# EAGLE board small_layout_untitled (EAGLE 9.6.2)

Size 125 x 110 mm. Coordinates in mm from the lower left corner, seen from the top.
Outline: 0,0 125,0 125,110 0,110 0,0
Copper layers (1+2*15+16): Top 0.035mm / dielectric 1.5mm / Route2 0.035mm / dielectric 0.15mm / Route15 0.035mm / dielectric 0.2mm / Bottom 0.035mm
Design rules "default *": minimum track width 6mil, minimum drill 0.35mm, track to track 6mil, track to pad 6mil, pad to pad 6mil, via to via 6mil, smd to smd 6mil, copper to edge 40mil, drill to drill 6mil, minimum pad ring 10mil, minimum via ring 8mil, stop-mask expansion 4mil, vias tented up to drill 0mil, thermal gap 10mil

## Footprints (pad centres in the part's own frame; a part is rotated, then mirrored left to right if it is on the bottom)
M0805 = smd 1.3 x 1.6: 1 -0.95,0; 2 0.95,0
1X10 = drill 1.016 long: 1 -11.43,0; 2 -8.89,0; 3 -6.35,0; 4 -3.81,0; 5 -1.27,0; 6 1.27,0; 7 3.81,0; 8 6.35,0; 9 8.89,0; 10 11.43,0
1X02 = drill 1.016 long: 1 -1.27,0; 2 1.27,0
1X04 = drill 1.016 long: 1 -3.81,0; 2 -1.27,0; 3 1.27,0; 4 3.81,0
SO16 = smd 0.6 x 1.2: 1 -4.445,-2.8; 2 -3.175,-2.8; 3 -1.905,-2.8; 4 -0.635,-2.8; 5 0.635,-2.8; 6 1.905,-2.8; 7 3.175,-2.8; 8 4.445,-2.8; 9 4.445,2.8; 10 3.175,2.8; 11 1.905,2.8; 12 0.635,2.8; 13 -0.635,2.8; 14 -1.905,2.8; 15 -3.175,2.8; 16 -4.445,2.8
TEXAS_INSTRUMENTS_SN74LVC16373A_2 = smd 1.6 x 0.3: 1 -3.9,5.75; 2 -3.9,5.25; 3 -3.9,4.75; 4 -3.9,4.25; 5 -3.9,3.75; 6 -3.9,3.25; 7 -3.9,2.75; 8 -3.9,2.25; 9 -3.9,1.75; 10 -3.9,1.25; 11 -3.9,0.75; 12 -3.9,0.25; 13 -3.9,-0.25; 14 -3.9,-0.75; 15 -3.9,-1.25; 16 -3.9,-1.75; 17 -3.9,-2.25; 18 -3.9,-2.75; 19 -3.9,-3.25; 20 -3.9,-3.75; 21 -3.9,-4.25; 22 -3.9,-4.75; 23 -3.9,-5.25; 24 -3.9,-5.75; 25 3.9,-5.75; 26 3.9,-5.25; 27 3.9,-4.75; 28 3.9,-4.25; 29 3.9,-3.75; 30 3.9,-3.25; 31 3.9,-2.75; 32 3.9,-2.25; 33 3.9,-1.75; 34 3.9,-1.25; 35 3.9,-0.75; 36 3.9,-0.25; 37 3.9,0.25; 38 3.9,0.75; 39 3.9,1.25; 40 3.9,1.75; 41 3.9,2.25; 42 3.9,2.75; 43 3.9,3.25; 44 3.9,3.75; 45 3.9,4.25; 46 3.9,4.75; 47 3.9,5.25; 48 3.9,5.75
FH12-20S-0.5SH = smd 0.3 x 1.3: 1 -4.75,3.25; 2 -4.25,3.25; 3 -3.75,3.25; 4 -3.25,3.25; 5 -2.75,3.25; 6 -2.25,3.25; 7 -1.75,3.25; 8 -1.25,3.25; 9 -0.75,3.25; 10 -0.25,3.25; 11 0.25,3.25; 12 0.75,3.25; 13 1.25,3.25; 14 1.75,3.25; 15 2.25,3.25; 16 2.75,3.25; 17 3.25,3.25; 18 3.75,3.25; 19 4.25,3.25; 20 4.75,3.25

## Placement (x,y rotation side)
CONNECTION_BETWEEN_SR5-6  [M0805]  15,30 270 top
CONNECTION_BETWEEN_SR10-11  [M0805]  15,50 270 top
CONNECTION_BETWEEN_SR15-16  [M0805]  15,70 270 top
CONNECTION_BETWEEN_SR20-21  [M0805]  15,90 270 top
EN_JP1  [1X10]  8,55 90 top
EN_JP2  [1X10]  119,55 90 top
IN_JP1  [1X02]  13.5,20 90 top
IN_JP2  [1X02]  13.5,40 90 top
IN_JP3  [1X02]  13.5,60 90 top
IN_JP4  [1X02]  13.5,80 90 top
IN_JP5  [1X02]  13.5,100 90 top
LATCH1-2  [M0805]  12,30 270 top
LATCH2-3  [M0805]  12,50 270 top
LATCH3-4  [M0805]  12,70 270 top
LATCH4-5  [M0805]  12,90 270 top
OUT_JP1  [1X02]  115,20 90 top
OUT_JP2  [1X02]  115,40 90 top
OUT_JP3  [1X02]  115,60 90 top
OUT_JP4  [1X02]  115,80 90 top
OUT_JP5  [1X02]  115,100 90 top
POWER_JP1  [1X04]  8,15 90 top
POWER_JP2  [1X04]  8,95 90 top
POWER_JP3  [1X04]  119,15 90 top
POWER_JP4  [1X04]  119,95 90 top
SR1  74HC595  [SO16]  25,20 0 top
SR2  74HC595  [SO16]  45,20 0 top
SR3  74HC595  [SO16]  65,20 0 top
SR4  74HC595  [SO16]  85,20 0 top
SR5  74HC595  [SO16]  105,20 0 top
SR6  74HC595  [SO16]  25,40 0 top
SR7  74HC595  [SO16]  45,40 0 top
SR8  74HC595  [SO16]  65,40 0 top
SR9  74HC595  [SO16]  85,40 0 top
SR10  74HC595  [SO16]  105,40 0 top
SR11  74HC595  [SO16]  25,60 0 top
SR12  74HC595  [SO16]  45,60 0 top
SR13  74HC595  [SO16]  65,60 0 top
SR14  74HC595  [SO16]  85,60 0 top
SR15  74HC595  [SO16]  105,60 0 top
SR16  74HC595  [SO16]  25,80 0 top
SR17  74HC595  [SO16]  45,80 0 top
SR18  74HC595  [SO16]  65,80 0 top
SR19  74HC595  [SO16]  85,80 0 top
SR20  74HC595  [SO16]  105,80 0 top
SR21  74HC595  [SO16]  25,100 0 top
SR22  74HC595  [SO16]  45,100 0 top
SR23  74HC595  [SO16]  65,100 0 top
SR24  74HC595  [SO16]  85,100 0 top
SR25  74HC595  [SO16]  105,100 0 top
U1  TEXAS_INSTRUMENTS_SN74LVC16373ATEXAS_INSTRUMENTS_SN74LVC16373A_0_2  [TEXAS_INSTRUMENTS_SN74LVC16373A_2]  25,10 90 top
U2  TEXAS_INSTRUMENTS_SN74LVC16373ATEXAS_INSTRUMENTS_SN74LVC16373A_0_2  [TEXAS_INSTRUMENTS_SN74LVC16373A_2]  45,10 90 top
U3  TEXAS_INSTRUMENTS_SN74LVC16373ATEXAS_INSTRUMENTS_SN74LVC16373A_0_2  [TEXAS_INSTRUMENTS_SN74LVC16373A_2]  65,10 90 top
U4  TEXAS_INSTRUMENTS_SN74LVC16373ATEXAS_INSTRUMENTS_SN74LVC16373A_0_2  [TEXAS_INSTRUMENTS_SN74LVC16373A_2]  85,10 90 top
U5  TEXAS_INSTRUMENTS_SN74LVC16373ATEXAS_INSTRUMENTS_SN74LVC16373A_0_2  [TEXAS_INSTRUMENTS_SN74LVC16373A_2]  105,10 90 top
U6  TEXAS_INSTRUMENTS_SN74LVC16373ATEXAS_INSTRUMENTS_SN74LVC16373A_0_2  [TEXAS_INSTRUMENTS_SN74LVC16373A_2]  25,30 90 top
U7  TEXAS_INSTRUMENTS_SN74LVC16373ATEXAS_INSTRUMENTS_SN74LVC16373A_0_2  [TEXAS_INSTRUMENTS_SN74LVC16373A_2]  45,30 90 top
U8  TEXAS_INSTRUMENTS_SN74LVC16373ATEXAS_INSTRUMENTS_SN74LVC16373A_0_2  [TEXAS_INSTRUMENTS_SN74LVC16373A_2]  65,30 90 top
U9  TEXAS_INSTRUMENTS_SN74LVC16373ATEXAS_INSTRUMENTS_SN74LVC16373A_0_2  [TEXAS_INSTRUMENTS_SN74LVC16373A_2]  85,30 90 top
U10  TEXAS_INSTRUMENTS_SN74LVC16373ATEXAS_INSTRUMENTS_SN74LVC16373A_0_2  [TEXAS_INSTRUMENTS_SN74LVC16373A_2]  105,30 90 top
U11  TEXAS_INSTRUMENTS_SN74LVC16373ATEXAS_INSTRUMENTS_SN74LVC16373A_0_2  [TEXAS_INSTRUMENTS_SN74LVC16373A_2]  25,50 90 top
U12  TEXAS_INSTRUMENTS_SN74LVC16373ATEXAS_INSTRUMENTS_SN74LVC16373A_0_2  [TEXAS_INSTRUMENTS_SN74LVC16373A_2]  45,50 90 top
U13  TEXAS_INSTRUMENTS_SN74LVC16373ATEXAS_INSTRUMENTS_SN74LVC16373A_0_2  [TEXAS_INSTRUMENTS_SN74LVC16373A_2]  65,50 90 top
U14  TEXAS_INSTRUMENTS_SN74LVC16373ATEXAS_INSTRUMENTS_SN74LVC16373A_0_2  [TEXAS_INSTRUMENTS_SN74LVC16373A_2]  85,50 90 top
U15  TEXAS_INSTRUMENTS_SN74LVC16373ATEXAS_INSTRUMENTS_SN74LVC16373A_0_2  [TEXAS_INSTRUMENTS_SN74LVC16373A_2]  105,50 90 top
U16  TEXAS_INSTRUMENTS_SN74LVC16373ATEXAS_INSTRUMENTS_SN74LVC16373A_0_2  [TEXAS_INSTRUMENTS_SN74LVC16373A_2]  25,70 90 top
U17  TEXAS_INSTRUMENTS_SN74LVC16373ATEXAS_INSTRUMENTS_SN74LVC16373A_0_2  [TEXAS_INSTRUMENTS_SN74LVC16373A_2]  45,70 90 top
U18  TEXAS_INSTRUMENTS_SN74LVC16373ATEXAS_INSTRUMENTS_SN74LVC16373A_0_2  [TEXAS_INSTRUMENTS_SN74LVC16373A_2]  65,70 90 top
U19  TEXAS_INSTRUMENTS_SN74LVC16373ATEXAS_INSTRUMENTS_SN74LVC16373A_0_2  [TEXAS_INSTRUMENTS_SN74LVC16373A_2]  85,70 90 top
U20  TEXAS_INSTRUMENTS_SN74LVC16373ATEXAS_INSTRUMENTS_SN74LVC16373A_0_2  [TEXAS_INSTRUMENTS_SN74LVC16373A_2]  105,70 90 top
U21  TEXAS_INSTRUMENTS_SN74LVC16373ATEXAS_INSTRUMENTS_SN74LVC16373A_0_2  [TEXAS_INSTRUMENTS_SN74LVC16373A_2]  25,90 90 top
U22  TEXAS_INSTRUMENTS_SN74LVC16373ATEXAS_INSTRUMENTS_SN74LVC16373A_0_2  [TEXAS_INSTRUMENTS_SN74LVC16373A_2]  45,90 90 top
U23  TEXAS_INSTRUMENTS_SN74LVC16373ATEXAS_INSTRUMENTS_SN74LVC16373A_0_2  [TEXAS_INSTRUMENTS_SN74LVC16373A_2]  65,90 90 top
U24  TEXAS_INSTRUMENTS_SN74LVC16373ATEXAS_INSTRUMENTS_SN74LVC16373A_0_2  [TEXAS_INSTRUMENTS_SN74LVC16373A_2]  85,90 90 top
U25  TEXAS_INSTRUMENTS_SN74LVC16373ATEXAS_INSTRUMENTS_SN74LVC16373A_0_2  [TEXAS_INSTRUMENTS_SN74LVC16373A_2]  105,90 90 top
X1  FH12-20S-0.5SH  [FH12-20S-0.5SH]  25,10 180 bottom
X2  FH12-20S-0.5SH  [FH12-20S-0.5SH]  50,10 180 bottom
X3  FH12-20S-0.5SH  [FH12-20S-0.5SH]  80,10 180 bottom
X4  FH12-20S-0.5SH  [FH12-20S-0.5SH]  105,10 180 bottom
X5  FH12-20S-0.5SH  [FH12-20S-0.5SH]  25,30 180 bottom
X6  FH12-20S-0.5SH  [FH12-20S-0.5SH]  50,30 180 bottom
X7  FH12-20S-0.5SH  [FH12-20S-0.5SH]  80,30 180 bottom
X8  FH12-20S-0.5SH  [FH12-20S-0.5SH]  105,30 180 bottom
X9  FH12-20S-0.5SH  [FH12-20S-0.5SH]  25,50 180 bottom
X10  FH12-20S-0.5SH  [FH12-20S-0.5SH]  50,50 180 bottom
X11  FH12-20S-0.5SH  [FH12-20S-0.5SH]  80,50 180 bottom
X12  FH12-20S-0.5SH  [FH12-20S-0.5SH]  105,50 180 bottom
X13  FH12-20S-0.5SH  [FH12-20S-0.5SH]  25,70 180 bottom
X14  FH12-20S-0.5SH  [FH12-20S-0.5SH]  50,70 180 bottom
X15  FH12-20S-0.5SH  [FH12-20S-0.5SH]  80,70 180 bottom
X16  FH12-20S-0.5SH  [FH12-20S-0.5SH]  105,70 180 bottom
X17  FH12-20S-0.5SH  [FH12-20S-0.5SH]  25,90 180 bottom
X18  FH12-20S-0.5SH  [FH12-20S-0.5SH]  50,90 180 bottom
X19  FH12-20S-0.5SH  [FH12-20S-0.5SH]  80,90 180 bottom
X20  FH12-20S-0.5SH  [FH12-20S-0.5SH]  105,90 180 bottom

## Library data of the parts
CONNECTION_BETWEEN_SR5-6 CONNECTION_BETWEEN_SR10-11 CONNECTION_BETWEEN_SR15-16 CONNECTION_BETWEEN_SR20-21 LATCH1-2 LATCH2-3 LATCH3-4 LATCH4-5 = rcl; SPICEPREFIX: R
EN_JP1 EN_JP2 IN_JP1-IN_JP5 OUT_JP1-OUT_JP5 POWER_JP1-POWER_JP4 = pinhead
SR1-SR25 = 74HC595; AVAILABILITY: In Stock; DESCRIPTION: Shift Register Single 8-Bit Serial to Serial/Parallel 16-Pin SSOP T/R; MF: Nexperia; MP: 74HC595; PACKAGE: None; PRICE: None
U1-U25 = SN74LVC16373A(NEW_16BIT_LATCH); 3_STATE_OUTPUT: Yes; BITS: 16; CIIVA_IDS: 19307467; CODE__JEDEC: MO-153; DATASHEET_VERSION: SCAS755B; FOOTPRINT_VARIANT_NAME_0: Level C; FOOTPRINT_VARIANT_NAME_1: Level B; FOOTPRINT_VARIANT_NAME_2: Level A; F__NOM_VOLTAGEMAXMHZ: 100; ICC__NOM_VOLTAGEMAXMA: 0.02; IMPORTED: yes; IMPORTED_FROM: vault; IMPORT_TS: 1521844253; INPUT_TYPE: CMOS,TTL; LOGIC: true; MF: Texas Instruments; MPN: SN74LVC16373A; OPERATING_TEMPERATURE_RANGEC: -40 to 125,-40 to 85; OUTPUT_DRIVE_IOLIOHMAXMA: 24/-24; OUTPUT_LOGIC: Non-inverted; OUTPUT_TYPE: CMOS; PACKAGE: DGG0048A; PREFIX: U; RATING: Catalog; RELEASE_DATE: 1459328133; SCHMITT_TRIGGER: No; STATIC_CURRENT: 0.02; TECHNOLOGY_FAMILY: LVC; TPD__NOM_VOLTAGEMAXNS: 6.4,4.2,4.9; VAULT_GUID: 00FB3570-8383-4C82-A038-A58A20934C8C; VAULT_REVISION: B0EE8CD6-9ACA-4FFF-ACFC-C0240CF4C59E; VCC_MAX_V: 3.6; VCC_MIN_V: 1.65; VOLTAGE_NOM_V: 1.8,2.5,2.7,3.3
X1-X20 = con-hirose; MPN: FH12-20S-0.5SH(55); OC_FARNELL: 1324549; OC_NEWARK: 34M6166

## Nets
CLK: POWER_JP1.4 POWER_JP2.4 POWER_JP3.4 POWER_JP4.4 SR1.11 SR2.11 SR3.11 SR4.11 SR5.11 SR6.11 SR7.11 SR8.11 SR9.11 SR10.11 SR11.11 SR12.11 SR13.11 SR14.11 SR15.11 SR16.11 SR17.11 SR18.11 SR19.11 SR20.11 SR21.11 SR22.11 SR23.11 SR24.11 SR25.11
DATA_IN1: IN_JP1.2 SR1.14
DATA_IN2: CONNECTION_BETWEEN_SR5-6.1 IN_JP2.2 SR6.14
DATA_IN3: CONNECTION_BETWEEN_SR10-11.1 IN_JP3.2 SR11.14
DATA_IN4: CONNECTION_BETWEEN_SR15-16.1 IN_JP4.2 SR16.14
DATA_IN5: CONNECTION_BETWEEN_SR20-21.1 IN_JP5.2 SR21.14
DATA_OUT1: CONNECTION_BETWEEN_SR5-6.2 OUT_JP1.2 SR5.9
DATA_OUT2: CONNECTION_BETWEEN_SR10-11.2 OUT_JP2.2 SR10.9
DATA_OUT3: CONNECTION_BETWEEN_SR15-16.2 OUT_JP3.2 SR15.9
DATA_OUT4: CONNECTION_BETWEEN_SR20-21.2 OUT_JP4.2 SR20.9
DATA_OUT5: OUT_JP5.2 SR25.9
EN1: EN_JP1.1 EN_JP2.1 U1.48 U2.48 U3.48 U4.48 U5.48
EN2: EN_JP1.2 EN_JP2.2 U1.25 U2.25 U3.25 U4.25 U5.25
EN3: EN_JP1.3 EN_JP2.3 U6.48 U7.48 U8.48 U9.48 U10.48
EN4: EN_JP1.4 EN_JP2.4 U6.25 U7.25 U8.25 U9.25 U10.25
EN5: EN_JP1.5 EN_JP2.5 U11.48 U12.48 U13.48 U14.48 U15.48
EN6: EN_JP1.6 EN_JP2.6 U11.25 U12.25 U13.25 U14.25 U15.25
EN7: EN_JP1.7 EN_JP2.7 U16.48 U17.48 U18.48 U19.48 U20.48
EN8: EN_JP1.8 EN_JP2.8 U16.25 U17.25 U18.25 U19.25 U20.25
EN9: EN_JP1.9 EN_JP2.9 U21.48 U22.48 U23.48 U24.48 U25.48
EN10: EN_JP1.10 EN_JP2.10 U21.25 U22.25 U23.25 U24.25 U25.25
FPC1_1: U1.2 X1.1
FPC1_2: U1.3 X1.2
FPC1_3: U1.5 X1.3
FPC1_4: U1.6 X1.4
FPC1_5: U1.8 X1.5
FPC1_6: U1.9 X1.6
FPC1_7: U1.11 X1.7
FPC1_8: U1.12 X1.8
FPC1_9: U1.13 X1.9
FPC1_10: U1.14 X1.10
FPC1_11: U1.16 X1.11
FPC1_12: U1.17 X1.12
FPC1_13: U1.19 X1.13
FPC1_14: U1.20 X1.14
FPC1_15: U1.22 X1.15
FPC1_16: U1.23 X1.16
FPC1_17: U2.2 X1.17
FPC1_18: U2.3 X1.18
FPC1_19: U2.5 X1.19
FPC1_20: U2.6 X1.20
FPC2_1: U2.8 X2.1
FPC2_2: U2.9 X2.2
FPC2_3: U2.11 X2.3
FPC2_4: U2.12 X2.4
FPC2_5: U2.13 X2.5
FPC2_6: U2.14 X2.6
FPC2_7: U2.16 X2.7
FPC2_8: U2.17 X2.8
FPC2_9: U2.19 X2.9
FPC2_10: U2.20 X2.10
FPC2_11: U2.22 X2.11
FPC2_12: U2.23 X2.12
FPC2_13: U3.2 X2.13
FPC2_14: U3.3 X2.14
FPC2_15: U3.5 X2.15
FPC2_16: U3.6 X2.16
FPC2_17: U3.8 X2.17
FPC2_18: U3.9 X2.18
FPC2_19: U3.11 X2.19
FPC2_20: U3.12 X2.20
FPC3_1: U3.13 X3.1
FPC3_2: U3.14 X3.2
FPC3_3: U3.16 X3.3
FPC3_4: U3.17 X3.4
FPC3_5: U3.19 X3.5
FPC3_6: U3.20 X3.6
FPC3_7: U3.22 X3.7
FPC3_8: U3.23 X3.8
FPC3_9: U4.2 X3.9
FPC3_10: U4.3 X3.10
FPC3_11: U4.5 X3.11
FPC3_12: U4.6 X3.12
FPC3_13: U4.8 X3.13
FPC3_14: U4.9 X3.14
FPC3_15: U4.11 X3.15
FPC3_16: U4.12 X3.16
FPC3_17: U4.13 X3.17
FPC3_18: U4.14 X3.18
FPC3_19: U4.16 X3.19
FPC3_20: U4.17 X3.20
FPC4_1: U4.19 X4.1
FPC4_2: U4.20 X4.2
FPC4_3: U4.22 X4.3
FPC4_4: U4.23 X4.4
FPC4_5: U5.2 X4.5
FPC4_6: U5.3 X4.6
FPC4_7: U5.5 X4.7
FPC4_8: U5.6 X4.8
FPC4_9: U5.8 X4.9
FPC4_10: U5.9 X4.10
FPC4_11: U5.11 X4.11
FPC4_12: U5.12 X4.12
FPC4_13: U5.13 X4.13
FPC4_14: U5.14 X4.14
FPC4_15: U5.16 X4.15
FPC4_16: U5.17 X4.16
FPC4_17: U5.19 X4.17
FPC4_18: U5.20 X4.18
FPC4_19: U5.22 X4.19
FPC4_20: U5.23 X4.20
FPC5_1: U6.2 X5.1
FPC5_2: U6.3 X5.2
FPC5_3: U6.5 X5.3
FPC5_4: U6.6 X5.4
FPC5_5: U6.8 X5.5
FPC5_6: U6.9 X5.6
FPC5_7: U6.11 X5.7
FPC5_8: U6.12 X5.8
FPC5_9: U6.13 X5.9
FPC5_10: U6.14 X5.10
FPC5_11: U6.16 X5.11
FPC5_12: U6.17 X5.12
FPC5_13: U6.19 X5.13
FPC5_14: U6.20 X5.14
FPC5_15: U6.22 X5.15
FPC5_16: U6.23 X5.16
FPC5_17: U7.2 X5.17
FPC5_18: U7.3 X5.18
FPC5_19: U7.5 X5.19
FPC5_20: U7.6 X5.20
FPC6_1: U7.8 X6.1
FPC6_2: U7.9 X6.2
FPC6_3: U7.11 X6.3
FPC6_4: U7.12 X6.4
FPC6_5: U7.13 X6.5
FPC6_6: U7.14 X6.6
FPC6_7: U7.16 X6.7
FPC6_8: U7.17 X6.8
FPC6_9: U7.19 X6.9
FPC6_10: U7.20 X6.10
FPC6_11: U7.22 X6.11
FPC6_12: U7.23 X6.12
FPC6_13: U8.2 X6.13
FPC6_14: U8.3 X6.14
FPC6_15: U8.5 X6.15
FPC6_16: U8.6 X6.16
FPC6_17: U8.8 X6.17
FPC6_18: U8.9 X6.18
FPC6_19: U8.11 X6.19
FPC6_20: U8.12 X6.20
FPC7_1: U8.13 X7.1
FPC7_2: U8.14 X7.2
FPC7_3: U8.16 X7.3
FPC7_4: U8.17 X7.4
FPC7_5: U8.19 X7.5
FPC7_6: U8.20 X7.6
FPC7_7: U8.22 X7.7
FPC7_8: U8.23 X7.8
FPC7_9: U9.2 X7.9
FPC7_10: U9.3 X7.10
FPC7_11: U9.5 X7.11
FPC7_12: U9.6 X7.12
FPC7_13: U9.8 X7.13
FPC7_14: U9.9 X7.14
FPC7_15: U9.11 X7.15
FPC7_16: U9.12 X7.16
FPC7_17: U9.13 X7.17
FPC7_18: U9.14 X7.18
FPC7_19: U9.16 X7.19
FPC7_20: U9.17 X7.20
FPC8_1: U9.19 X8.1
FPC8_2: U9.20 X8.2
FPC8_3: U9.22 X8.3
FPC8_4: U9.23 X8.4
FPC8_5: U10.2 X8.5
FPC8_6: U10.3 X8.6
FPC8_7: U10.5 X8.7
FPC8_8: U10.6 X8.8
FPC8_9: U10.8 X8.9
FPC8_10: U10.9 X8.10
FPC8_11: U10.11 X8.11
FPC8_12: U10.12 X8.12
FPC8_13: U10.13 X8.13
FPC8_14: U10.14 X8.14
FPC8_15: U10.16 X8.15
FPC8_16: U10.17 X8.16
FPC8_17: U10.19 X8.17
FPC8_18: U10.20 X8.18
FPC8_19: U10.22 X8.19
FPC8_20: U10.23 X8.20
FPC9_1: U11.2 X9.1
FPC9_2: U11.3 X9.2
FPC9_3: U11.5 X9.3
FPC9_4: U11.6 X9.4
FPC9_5: U11.8 X9.5
FPC9_6: U11.9 X9.6
FPC9_7: U11.11 X9.7
FPC9_8: U11.12 X9.8
FPC9_9: U11.13 X9.9
FPC9_10: U11.14 X9.10
FPC9_11: U11.16 X9.11
FPC9_12: U11.17 X9.12
FPC9_13: U11.19 X9.13
FPC9_14: U11.20 X9.14
FPC9_15: U11.22 X9.15
FPC9_16: U11.23 X9.16
FPC9_17: U12.2 X9.17
FPC9_18: U12.3 X9.18
FPC9_19: U12.5 X9.19
FPC9_20: U12.6 X9.20
FPC10_1: U12.8 X10.1
FPC10_2: U12.9 X10.2
FPC10_3: U12.11 X10.3
FPC10_4: U12.12 X10.4
FPC10_5: U12.13 X10.5
FPC10_6: U12.14 X10.6
FPC10_7: U12.16 X10.7
FPC10_8: U12.17 X10.8
FPC10_9: U12.19 X10.9
FPC10_10: U12.20 X10.10
FPC10_11: U12.22 X10.11
FPC10_12: U12.23 X10.12
FPC10_13: U13.2 X10.13
FPC10_14: U13.3 X10.14
FPC10_15: U13.5 X10.15
FPC10_16: U13.6 X10.16
FPC10_17: U13.8 X10.17
FPC10_18: U13.9 X10.18
FPC10_19: U13.11 X10.19
FPC10_20: U13.12 X10.20
FPC11_1: U13.13 X11.1
FPC11_2: U13.14 X11.2
FPC11_3: U13.16 X11.3
FPC11_4: U13.17 X11.4
FPC11_5: U13.19 X11.5
FPC11_6: U13.20 X11.6
FPC11_7: U13.22 X11.7
FPC11_8: U13.23 X11.8
FPC11_9: U14.2 X11.9
FPC11_10: U14.3 X11.10
FPC11_11: U14.5 X11.11
FPC11_12: U14.6 X11.12
FPC11_13: U14.8 X11.13
FPC11_14: U14.9 X11.14
FPC11_15: U14.11 X11.15
FPC11_16: U14.12 X11.16
FPC11_17: U14.13 X11.17
FPC11_18: U14.14 X11.18
FPC11_19: U14.16 X11.19
FPC11_20: U14.17 X11.20
FPC12_1: U14.19 X12.1
FPC12_2: U14.20 X12.2
FPC12_3: U14.22 X12.3
FPC12_4: U14.23 X12.4
FPC12_5: U15.2 X12.5
FPC12_6: U15.3 X12.6
FPC12_7: U15.5 X12.7
FPC12_8: U15.6 X12.8
FPC12_9: U15.8 X12.9
FPC12_10: U15.9 X12.10
FPC12_11: U15.11 X12.11
FPC12_12: U15.12 X12.12
FPC12_13: U15.13 X12.13
FPC12_14: U15.14 X12.14
FPC12_15: U15.16 X12.15
FPC12_16: U15.17 X12.16
FPC12_17: U15.19 X12.17
FPC12_18: U15.20 X12.18
FPC12_19: U15.22 X12.19
FPC12_20: U15.23 X12.20
FPC13_1: U16.2 X13.1
FPC13_2: U16.3 X13.2
FPC13_3: U16.5 X13.3
FPC13_4: U16.6 X13.4
FPC13_5: U16.8 X13.5
FPC13_6: U16.9 X13.6
FPC13_7: U16.11 X13.7
FPC13_8: U16.12 X13.8
FPC13_9: U16.13 X13.9
FPC13_10: U16.14 X13.10
FPC13_11: U16.16 X13.11
FPC13_12: U16.17 X13.12
FPC13_13: U16.19 X13.13
FPC13_14: U16.20 X13.14
FPC13_15: U16.22 X13.15
FPC13_16: U16.23 X13.16
FPC13_17: U17.2 X13.17
FPC13_18: U17.3 X13.18
FPC13_19: U17.5 X13.19
FPC13_20: U17.6 X13.20
FPC14_1: U17.8 X14.1
FPC14_2: U17.9 X14.2
FPC14_3: U17.11 X14.3
FPC14_4: U17.12 X14.4
FPC14_5: U17.13 X14.5
FPC14_6: U17.14 X14.6
FPC14_7: U17.16 X14.7
FPC14_8: U17.17 X14.8
FPC14_9: U17.19 X14.9
FPC14_10: U17.20 X14.10
FPC14_11: U17.22 X14.11
FPC14_12: U17.23 X14.12
FPC14_13: U18.2 X14.13
FPC14_14: U18.3 X14.14
FPC14_15: U18.5 X14.15
FPC14_16: U18.6 X14.16
FPC14_17: U18.8 X14.17
FPC14_18: U18.9 X14.18
FPC14_19: U18.11 X14.19
FPC14_20: U18.12 X14.20
FPC15_1: U18.13 X15.1
FPC15_2: U18.14 X15.2
FPC15_3: U18.16 X15.3
FPC15_4: U18.17 X15.4
FPC15_5: U18.19 X15.5
FPC15_6: U18.20 X15.6
FPC15_7: U18.22 X15.7
FPC15_8: U18.23 X15.8
FPC15_9: U19.2 X15.9
FPC15_10: U19.3 X15.10
FPC15_11: U19.5 X15.11
FPC15_12: U19.6 X15.12
FPC15_13: U19.8 X15.13
FPC15_14: U19.9 X15.14
FPC15_15: U19.11 X15.15
FPC15_16: U19.12 X15.16
FPC15_17: U19.13 X15.17
FPC15_18: U19.14 X15.18
FPC15_19: U19.16 X15.19
FPC15_20: U19.17 X15.20
FPC16_1: U19.19 X16.1
FPC16_2: U19.20 X16.2
FPC16_3: U19.22 X16.3
FPC16_4: U19.23 X16.4
FPC16_5: U20.2 X16.5
FPC16_6: U20.3 X16.6
FPC16_7: U20.5 X16.7
FPC16_8: U20.6 X16.8
FPC16_9: U20.8 X16.9
FPC16_10: U20.9 X16.10
FPC16_11: U20.11 X16.11
FPC16_12: U20.12 X16.12
FPC16_13: U20.13 X16.13
FPC16_14: U20.14 X16.14
FPC16_15: U20.16 X16.15
FPC16_16: U20.17 X16.16
FPC16_17: U20.19 X16.17
FPC16_18: U20.20 X16.18
FPC16_19: U20.22 X16.19
FPC16_20: U20.23 X16.20
FPC17_1: U21.2 X17.1
FPC17_2: U21.3 X17.2
FPC17_3: U21.5 X17.3
FPC17_4: U21.6 X17.4
FPC17_5: U21.8 X17.5
FPC17_6: U21.9 X17.6
FPC17_7: U21.11 X17.7
FPC17_8: U21.12 X17.8
FPC17_9: U21.13 X17.9
FPC17_10: U21.14 X17.10
FPC17_11: U21.16 X17.11
FPC17_12: U21.17 X17.12
FPC17_13: U21.19 X17.13
FPC17_14: U21.20 X17.14
FPC17_15: U21.22 X17.15
FPC17_16: U21.23 X17.16
FPC17_17: U22.2 X17.17
FPC17_18: U22.3 X17.18
FPC17_19: U22.5 X17.19
FPC17_20: U22.6 X17.20
FPC18_1: U22.8 X18.1
FPC18_2: U22.9 X18.2
FPC18_3: U22.11 X18.3
FPC18_4: U22.12 X18.4
FPC18_5: U22.13 X18.5
FPC18_6: U22.14 X18.6
FPC18_7: U22.16 X18.7
FPC18_8: U22.17 X18.8
FPC18_9: U22.19 X18.9
FPC18_10: U22.20 X18.10
FPC18_11: U22.22 X18.11
FPC18_12: U22.23 X18.12
FPC18_13: U23.2 X18.13
FPC18_14: U23.3 X18.14
FPC18_15: U23.5 X18.15
FPC18_16: U23.6 X18.16
FPC18_17: U23.8 X18.17
FPC18_18: U23.9 X18.18
FPC18_19: U23.11 X18.19
FPC18_20: U23.12 X18.20
FPC19_1: U23.13 X19.1
FPC19_2: U23.14 X19.2
FPC19_3: U23.16 X19.3
FPC19_4: U23.17 X19.4
FPC19_5: U23.19 X19.5
FPC19_6: U23.20 X19.6
FPC19_7: U23.22 X19.7
FPC19_8: U23.23 X19.8
FPC19_9: U24.2 X19.9
FPC19_10: U24.3 X19.10
FPC19_11: U24.5 X19.11
FPC19_12: U24.6 X19.12
FPC19_13: U24.8 X19.13
FPC19_14: U24.9 X19.14
FPC19_15: U24.11 X19.15
FPC19_16: U24.12 X19.16
FPC19_17: U24.13 X19.17
FPC19_18: U24.14 X19.18
FPC19_19: U24.16 X19.19
FPC19_20: U24.17 X19.20
FPC20_1: U24.19 X20.1
FPC20_2: U24.20 X20.2
FPC20_3: U24.22 X20.3
FPC20_4: U24.23 X20.4
FPC20_5: U25.2 X20.5
FPC20_6: U25.3 X20.6
FPC20_7: U25.5 X20.7
FPC20_8: U25.6 X20.8
FPC20_9: U25.8 X20.9
FPC20_10: U25.9 X20.10
FPC20_11: U25.11 X20.11
FPC20_12: U25.12 X20.12
FPC20_13: U25.13 X20.13
FPC20_14: U25.14 X20.14
FPC20_15: U25.16 X20.15
FPC20_16: U25.17 X20.16
FPC20_17: U25.19 X20.17
FPC20_18: U25.20 X20.18
FPC20_19: U25.22 X20.19
FPC20_20: U25.23 X20.20
GND: POWER_JP1.3 POWER_JP2.3 POWER_JP3.3 POWER_JP4.3 SR1.8 SR1.13 SR2.8 SR2.13 SR3.8 SR3.13 SR4.8 SR4.13 SR5.8 SR5.13 SR6.8 SR6.13 SR7.8 SR7.13 SR8.8 SR8.13 SR9.8 SR9.13 SR10.8 SR10.13 SR11.8 SR11.13 SR12.8 SR12.13 SR13.8 SR13.13 SR14.8 SR14.13 SR15.8 SR15.13 SR16.8 SR16.13 SR17.8 SR17.13 SR18.8 SR18.13 SR19.8 SR19.13 SR20.8 SR20.13 SR21.8 SR21.13 SR22.8 SR22.13 SR23.8 SR23.13 SR24.8 SR24.13 SR25.8 SR25.13 U1.1 U1.4 U1.10 U1.15 U1.21 U1.24 U1.28 U1.34 U1.39 U1.45 U2.1 U2.4 U2.10 U2.15 U2.21 U2.24 U2.28 U2.34 U2.39 U2.45 U3.1 U3.4 U3.10 U3.15 U3.21 U3.24 U3.28 U3.34 U3.39 U3.45 U4.1 U4.4 U4.10 U4.15 U4.21 U4.24 U4.28 U4.34 U4.39 U4.45 U5.1 U5.4 U5.10 U5.15 U5.21 U5.24 U5.28 U5.34 U5.39 U5.45 U6.1 U6.4 U6.10 U6.15 U6.21 U6.24 U6.28 U6.34 U6.39 U6.45 U7.1 U7.4 U7.10 U7.15 U7.21 U7.24 U7.28 U7.34 U7.39 U7.45 U8.1 U8.4 U8.10 U8.15 U8.21 U8.24 U8.28 U8.34 U8.39 U8.45 U9.1 U9.4 U9.10 U9.15 U9.21 U9.24 U9.28 U9.34 U9.39 U9.45 U10.1 U10.4 U10.10 U10.15 U10.21 U10.24 U10.28 U10.34 U10.39 U10.45 U11.1 U11.4 U11.10 U11.15 U11.21 U11.24 U11.28 U11.34 U11.39 U11.45 U12.1 U12.4 U12.10 U12.15 U12.21 U12.24 U12.28 U12.34 U12.39 U12.45 U13.1 U13.4 U13.10 U13.15 U13.21 U13.24 U13.28 U13.34 U13.39 U13.45 U14.1 U14.4 U14.10 U14.15 U14.21 U14.24 U14.28 U14.34 U14.39 U14.45 U15.1 U15.4 U15.10 U15.15 U15.21 U15.24 U15.28 U15.34 U15.39 U15.45 U16.1 U16.4 U16.10 U16.15 U16.21 U16.24 U16.28 U16.34 U16.39 U16.45 U17.1 U17.4 U17.10 U17.15 U17.21 U17.24 U17.28 U17.34 U17.39 U17.45 U18.1 U18.4 U18.10 U18.15 U18.21 U18.24 U18.28 U18.34 U18.39 U18.45 U19.1 U19.4 U19.10 U19.15 U19.21 U19.24 U19.28 U19.34 U19.39 U19.45 U20.1 U20.4 U20.10 U20.15 U20.21 U20.24 U20.28 U20.34 U20.39 U20.45 U21.1 U21.4 U21.10 U21.15 U21.21 U21.24 U21.28 U21.34 U21.39 U21.45 U22.1 U22.4 U22.10 U22.15 U22.21 U22.24 U22.28 U22.34 U22.39 U22.45 U23.1 U23.4 U23.10 U23.15 U23.21 U23.24 U23.28 U23.34 U23.39 U23.45 U24.1 U24.4 U24.10 U24.15 U24.21 U24.24 U24.28 U24.34 U24.39 U24.45 U25.1 U25.4 U25.10 U25.15 U25.21 U25.24 U25.28 U25.34 U25.39 U25.45
LATCH_CLK1: IN_JP1.1 LATCH1-2.2 OUT_JP1.1 SR1.12 SR2.12 SR3.12 SR4.12 SR5.12
LATCH_CLK2: IN_JP2.1 LATCH1-2.1 LATCH2-3.2 OUT_JP2.1 SR6.12 SR7.12 SR8.12 SR9.12 SR10.12
LATCH_CLK3: IN_JP3.1 LATCH2-3.1 LATCH3-4.2 OUT_JP3.1 SR11.12 SR12.12 SR13.12 SR14.12 SR15.12
LATCH_CLK4: IN_JP4.1 LATCH3-4.1 LATCH4-5.2 OUT_JP4.1 SR16.12 SR17.12 SR18.12 SR19.12 SR20.12
LATCH_CLK5: IN_JP5.1 LATCH4-5.1 OUT_JP5.1 SR21.12 SR22.12 SR23.12 SR24.12 SR25.12
N$1: SR1.9 SR2.14
N$2: SR4.9 SR5.14
N$3: SR6.9 SR7.14
N$4: SR7.9 SR8.14
N$5: SR8.9 SR9.14
N$6: SR9.9 SR10.14
N$7: SR11.9 SR12.14
N$8: SR2.9 SR3.14
N$9: SR12.9 SR13.14
N$10: SR13.9 SR14.14
N$12: SR14.9 SR15.14
N$13: SR16.9 SR17.14
N$14: SR17.9 SR18.14
N$15: SR3.9 SR4.14
N$16: SR18.9 SR19.14
N$17: SR19.9 SR20.14
N$18: SR21.9 SR22.14
N$19: SR22.9 SR23.14
N$21: SR23.9 SR24.14
N$22: SR24.9 SR25.14
SR_OUT1_1: SR1.15 U1.36 U1.47
SR_OUT1_2: SR1.1 U1.35 U1.46
SR_OUT1_3: SR1.2 U1.33 U1.44
SR_OUT1_4: SR1.3 U1.32 U1.43
SR_OUT1_5: SR1.4 U1.30 U1.41
SR_OUT1_6: SR1.5 U1.29 U1.40
SR_OUT1_7: SR1.6 U1.27 U1.38
SR_OUT1_8: SR1.7 U1.26 U1.37
SR_OUT2_1: SR2.15 U2.36 U2.47
SR_OUT2_2: SR2.1 U2.35 U2.46
SR_OUT2_3: SR2.2 U2.33 U2.44
SR_OUT2_4: SR2.3 U2.32 U2.43
SR_OUT2_5: SR2.4 U2.30 U2.41
SR_OUT2_6: SR2.5 U2.29 U2.40
SR_OUT2_7: SR2.6 U2.27 U2.38
SR_OUT2_8: SR2.7 U2.26 U2.37
SR_OUT3_1: SR3.15 U3.36 U3.47
SR_OUT3_2: SR3.1 U3.35 U3.46
SR_OUT3_3: SR3.2 U3.33 U3.44
SR_OUT3_4: SR3.3 U3.32 U3.43
SR_OUT3_5: SR3.4 U3.30 U3.41
SR_OUT3_6: SR3.5 U3.29 U3.40
SR_OUT3_7: SR3.6 U3.27 U3.38
SR_OUT3_8: SR3.7 U3.26 U3.37
SR_OUT4_1: SR4.15 U4.36 U4.47
SR_OUT4_2: SR4.1 U4.35 U4.46
SR_OUT4_3: SR4.2 U4.33 U4.44
SR_OUT4_4: SR4.3 U4.32 U4.43
SR_OUT4_5: SR4.4 U4.30 U4.41
SR_OUT4_6: SR4.5 U4.29 U4.40
SR_OUT4_7: SR4.6 U4.27 U4.38
SR_OUT4_8: SR4.7 U4.26 U4.37
SR_OUT5_1: SR5.15 U5.36 U5.47
SR_OUT5_2: SR5.1 U5.35 U5.46
SR_OUT5_3: SR5.2 U5.33 U5.44
SR_OUT5_4: SR5.3 U5.32 U5.43
SR_OUT5_5: SR5.4 U5.30 U5.41
SR_OUT5_6: SR5.5 U5.29 U5.40
SR_OUT5_7: SR5.6 U5.27 U5.38
SR_OUT5_8: SR5.7 U5.26 U5.37
SR_OUT6_1: SR6.15 U6.36 U6.47
SR_OUT6_2: SR6.1 U6.35 U6.46
SR_OUT6_3: SR6.2 U6.33 U6.44
SR_OUT6_4: SR6.3 U6.32 U6.43
SR_OUT6_5: SR6.4 U6.30 U6.41
SR_OUT6_6: SR6.5 U6.29 U6.40
SR_OUT6_7: SR6.6 U6.27 U6.38
SR_OUT6_8: SR6.7 U6.26 U6.37
SR_OUT7_1: SR7.15 U7.36 U7.47
SR_OUT7_2: SR7.1 U7.35 U7.46
SR_OUT7_3: SR7.2 U7.33 U7.44
SR_OUT7_4: SR7.3 U7.32 U7.43
SR_OUT7_5: SR7.4 U7.30 U7.41
SR_OUT7_6: SR7.5 U7.29 U7.40
SR_OUT7_7: SR7.6 U7.27 U7.38
SR_OUT7_8: SR7.7 U7.26 U7.37
SR_OUT8_1: SR8.15 U8.36 U8.47
SR_OUT8_2: SR8.1 U8.35 U8.46
SR_OUT8_3: SR8.2 U8.33 U8.44
SR_OUT8_4: SR8.3 U8.32 U8.43
SR_OUT8_5: SR8.4 U8.30 U8.41
SR_OUT8_6: SR8.5 U8.29 U8.40
SR_OUT8_7: SR8.6 U8.27 U8.38
SR_OUT8_8: SR8.7 U8.26 U8.37
SR_OUT9_1: SR9.15 U9.36 U9.47
SR_OUT9_2: SR9.1 U9.35 U9.46
SR_OUT9_3: SR9.2 U9.33 U9.44
SR_OUT9_4: SR9.3 U9.32 U9.43
SR_OUT9_5: SR9.4 U9.30 U9.41
SR_OUT9_6: SR9.5 U9.29 U9.40
SR_OUT9_7: SR9.6 U9.27 U9.38
SR_OUT9_8: SR9.7 U9.26 U9.37
SR_OUT10_1: SR10.15 U10.36 U10.47
SR_OUT10_2: SR10.1 U10.35 U10.46
SR_OUT10_3: SR10.2 U10.33 U10.44
SR_OUT10_4: SR10.3 U10.32 U10.43
SR_OUT10_5: SR10.4 U10.30 U10.41
SR_OUT10_6: SR10.5 U10.29 U10.40
SR_OUT10_7: SR10.6 U10.27 U10.38
SR_OUT10_8: SR10.7 U10.26 U10.37
SR_OUT11_1: SR11.15 U11.36 U11.47
SR_OUT11_2: SR11.1 U11.35 U11.46
SR_OUT11_3: SR11.2 U11.33 U11.44
SR_OUT11_4: SR11.3 U11.32 U11.43
SR_OUT11_5: SR11.4 U11.30 U11.41
SR_OUT11_6: SR11.5 U11.29 U11.40
SR_OUT11_7: SR11.6 U11.27 U11.38
SR_OUT11_8: SR11.7 U11.26 U11.37
SR_OUT12_1: SR12.15 U12.36 U12.47
SR_OUT12_2: SR12.1 U12.35 U12.46
SR_OUT12_3: SR12.2 U12.33 U12.44
SR_OUT12_4: SR12.3 U12.32 U12.43
SR_OUT12_5: SR12.4 U12.30 U12.41
SR_OUT12_6: SR12.5 U12.29 U12.40
SR_OUT12_7: SR12.6 U12.27 U12.38
SR_OUT12_8: SR12.7 U12.26 U12.37
SR_OUT13_1: SR13.15 U13.36 U13.47
SR_OUT13_2: SR13.1 U13.35 U13.46
SR_OUT13_3: SR13.2 U13.33 U13.44
SR_OUT13_4: SR13.3 U13.32 U13.43
SR_OUT13_5: SR13.4 U13.30 U13.41
SR_OUT13_6: SR13.5 U13.29 U13.40
SR_OUT13_7: SR13.6 U13.27 U13.38
SR_OUT13_8: SR13.7 U13.26 U13.37
SR_OUT14_1: SR14.15 U14.36 U14.47
SR_OUT14_2: SR14.1 U14.35 U14.46
SR_OUT14_3: SR14.2 U14.33 U14.44
SR_OUT14_4: SR14.3 U14.32 U14.43
SR_OUT14_5: SR14.4 U14.30 U14.41
SR_OUT14_6: SR14.5 U14.29 U14.40
SR_OUT14_7: SR14.6 U14.27 U14.38
SR_OUT14_8: SR14.7 U14.26 U14.37
SR_OUT15_1: SR15.15 U15.36 U15.47
SR_OUT15_2: SR15.1 U15.35 U15.46
SR_OUT15_3: SR15.2 U15.33 U15.44
SR_OUT15_4: SR15.3 U15.32 U15.43
SR_OUT15_5: SR15.4 U15.30 U15.41
SR_OUT15_6: SR15.5 U15.29 U15.40
SR_OUT15_7: SR15.6 U15.27 U15.38
SR_OUT15_8: SR15.7 U15.26 U15.37
SR_OUT16_1: SR16.15 U16.36 U16.47
SR_OUT16_2: SR16.1 U16.35 U16.46
SR_OUT16_3: SR16.2 U16.33 U16.44
SR_OUT16_4: SR16.3 U16.32 U16.43
SR_OUT16_5: SR16.4 U16.30 U16.41
SR_OUT16_6: SR16.5 U16.29 U16.40
SR_OUT16_7: SR16.6 U16.27 U16.38
SR_OUT16_8: SR16.7 U16.26 U16.37
SR_OUT17_1: SR17.15 U17.36 U17.47
SR_OUT17_2: SR17.1 U17.35 U17.46
SR_OUT17_3: SR17.2 U17.33 U17.44
SR_OUT17_4: SR17.3 U17.32 U17.43
SR_OUT17_5: SR17.4 U17.30 U17.41
SR_OUT17_6: SR17.5 U17.29 U17.40
SR_OUT17_7: SR17.6 U17.27 U17.38
SR_OUT17_8: SR17.7 U17.26 U17.37
SR_OUT18_1: SR18.15 U18.36 U18.47
SR_OUT18_2: SR18.1 U18.35 U18.46
SR_OUT18_3: SR18.2 U18.33 U18.44
SR_OUT18_4: SR18.3 U18.32 U18.43
SR_OUT18_5: SR18.4 U18.30 U18.41
SR_OUT18_6: SR18.5 U18.29 U18.40
SR_OUT18_7: SR18.6 U18.27 U18.38
SR_OUT18_8: SR18.7 U18.26 U18.37
SR_OUT19_1: SR19.15 U19.36 U19.47
SR_OUT19_2: SR19.1 U19.35 U19.46
SR_OUT19_3: SR19.2 U19.33 U19.44
SR_OUT19_4: SR19.3 U19.32 U19.43
SR_OUT19_5: SR19.4 U19.30 U19.41
SR_OUT19_6: SR19.5 U19.29 U19.40
SR_OUT19_7: SR19.6 U19.27 U19.38
SR_OUT19_8: SR19.7 U19.26 U19.37
SR_OUT20_1: SR20.15 U20.36 U20.47
SR_OUT20_2: SR20.1 U20.35 U20.46
SR_OUT20_3: SR20.2 U20.33 U20.44
SR_OUT20_4: SR20.3 U20.32 U20.43
SR_OUT20_5: SR20.4 U20.30 U20.41
SR_OUT20_6: SR20.5 U20.29 U20.40
SR_OUT20_7: SR20.6 U20.27 U20.38
SR_OUT20_8: SR20.7 U20.26 U20.37
SR_OUT21_1: SR21.15 U21.36 U21.47
SR_OUT21_2: SR21.1 U21.35 U21.46
SR_OUT21_3: SR21.2 U21.33 U21.44
SR_OUT21_4: SR21.3 U21.32 U21.43
SR_OUT21_5: SR21.4 U21.30 U21.41
SR_OUT21_6: SR21.5 U21.29 U21.40
SR_OUT21_7: SR21.6 U21.27 U21.38
SR_OUT21_8: SR21.7 U21.26 U21.37
SR_OUT22_1: SR22.15 U22.36 U22.47
SR_OUT22_2: SR22.1 U22.35 U22.46
SR_OUT22_3: SR22.2 U22.33 U22.44
SR_OUT22_4: SR22.3 U22.32 U22.43
SR_OUT22_5: SR22.4 U22.30 U22.41
SR_OUT22_6: SR22.5 U22.29 U22.40
SR_OUT22_7: SR22.6 U22.27 U22.38
SR_OUT22_8: SR22.7 U22.26 U22.37
SR_OUT23_1: SR23.15 U23.36 U23.47
SR_OUT23_2: SR23.1 U23.35 U23.46
SR_OUT23_3: SR23.2 U23.33 U23.44
SR_OUT23_4: SR23.3 U23.32 U23.43
SR_OUT23_5: SR23.4 U23.30 U23.41
SR_OUT23_6: SR23.5 U23.29 U23.40
SR_OUT23_7: SR23.6 U23.27 U23.38
SR_OUT23_8: SR23.7 U23.26 U23.37
SR_OUT24_1: SR24.15 U24.36 U24.47
SR_OUT24_2: SR24.1 U24.35 U24.46
SR_OUT24_3: SR24.2 U24.33 U24.44
SR_OUT24_4: SR24.3 U24.32 U24.43
SR_OUT24_5: SR24.4 U24.30 U24.41
SR_OUT24_6: SR24.5 U24.29 U24.40
SR_OUT24_7: SR24.6 U24.27 U24.38
SR_OUT24_8: SR24.7 U24.26 U24.37
SR_OUT25_1: SR25.15 U25.36 U25.47
SR_OUT25_2: SR25.1 U25.35 U25.46
SR_OUT25_3: SR25.2 U25.33 U25.44
SR_OUT25_4: SR25.3 U25.32 U25.43
SR_OUT25_5: SR25.4 U25.30 U25.41
SR_OUT25_6: SR25.5 U25.29 U25.40
SR_OUT25_7: SR25.6 U25.27 U25.38
SR_OUT25_8: SR25.7 U25.26 U25.37
VCC_LATCH: POWER_JP1.2 POWER_JP2.2 POWER_JP3.2 POWER_JP4.2 U1.7 U1.18 U1.31 U1.42 U2.7 U2.18 U2.31 U2.42 U3.7 U3.18 U3.31 U3.42 U4.7 U4.18 U4.31 U4.42 U5.7 U5.18 U5.31 U5.42 U6.7 U6.18 U6.31 U6.42 U7.7 U7.18 U7.31 U7.42 U8.7 U8.18 U8.31 U8.42 U9.7 U9.18 U9.31 U9.42 U10.7 U10.18 U10.31 U10.42 U11.7 U11.18 U11.31 U11.42 U12.7 U12.18 U12.31 U12.42 U13.7 U13.18 U13.31 U13.42 U14.7 U14.18 U14.31 U14.42 U15.7 U15.18 U15.31 U15.42 U16.7 U16.18 U16.31 U16.42 U17.7 U17.18 U17.31 U17.42 U18.7 U18.18 U18.31 U18.42 U19.7 U19.18 U19.31 U19.42 U20.7 U20.18 U20.31 U20.42 U21.7 U21.18 U21.31 U21.42 U22.7 U22.18 U22.31 U22.42 U23.7 U23.18 U23.31 U23.42 U24.7 U24.18 U24.31 U24.42 U25.7 U25.18 U25.31 U25.42
VCC_SR: POWER_JP1.1 POWER_JP2.1 POWER_JP3.1 POWER_JP4.1 SR1.10 SR1.16 SR2.10 SR2.16 SR3.10 SR3.16 SR4.10 SR4.16 SR5.10 SR5.16 SR6.10 SR6.16 SR7.10 SR7.16 SR8.10 SR8.16 SR9.10 SR9.16 SR10.10 SR10.16 SR11.10 SR11.16 SR12.10 SR12.16 SR13.10 SR13.16 SR14.10 SR14.16 SR15.10 SR15.16 SR16.10 SR16.16 SR17.10 SR17.16 SR18.10 SR18.16 SR19.10 SR19.16 SR20.10 SR20.16 SR21.10 SR21.16 SR22.10 SR22.16 SR23.10 SR23.16 SR24.10 SR24.16 SR25.10 SR25.16

## Tracks (layer width: path | path; a pad name or v marks a point on that pad's centre or on a via)
CLK  (28 unrouted)
DATA_IN1  (1 unrouted)
DATA_IN2  (2 unrouted)
DATA_IN3  (2 unrouted)
DATA_IN4  (2 unrouted)
DATA_IN5  (2 unrouted)
DATA_OUT1  (2 unrouted)
DATA_OUT2  (2 unrouted)
DATA_OUT3  (2 unrouted)
DATA_OUT4  (2 unrouted)
DATA_OUT5  (1 unrouted)
EN1  (6 unrouted)
EN2  (6 unrouted)
EN3  (6 unrouted)
EN4  (6 unrouted)
EN5  (6 unrouted)
EN6  (6 unrouted)
EN7  (6 unrouted)
EN8  (6 unrouted)
EN9  (6 unrouted)
EN10  (6 unrouted)
FPC1_1  (1 unrouted)
FPC1_2  (1 unrouted)
FPC1_3  (1 unrouted)
FPC1_4  (1 unrouted)
FPC1_5  (1 unrouted)
FPC1_6  (1 unrouted)
FPC1_7  (1 unrouted)
FPC1_8  (1 unrouted)
FPC1_9  (1 unrouted)
FPC1_10  (1 unrouted)
FPC1_11  (1 unrouted)
FPC1_12  (1 unrouted)
FPC1_13  (1 unrouted)
FPC1_14  (1 unrouted)
FPC1_15  (1 unrouted)
FPC1_16  (1 unrouted)
FPC1_17  (1 unrouted)
FPC1_18  (1 unrouted)
FPC1_19  (1 unrouted)
FPC1_20  (1 unrouted)
FPC2_1  (1 unrouted)
FPC2_2  (1 unrouted)
FPC2_3  (1 unrouted)
FPC2_4  (1 unrouted)
FPC2_5  (1 unrouted)
FPC2_6  (1 unrouted)
FPC2_7  (1 unrouted)
FPC2_8  (1 unrouted)
FPC2_9  (1 unrouted)
FPC2_10  (1 unrouted)
FPC2_11  (1 unrouted)
FPC2_12  (1 unrouted)
FPC2_13  (1 unrouted)
FPC2_14  (1 unrouted)
FPC2_15  (1 unrouted)
FPC2_16  (1 unrouted)
FPC2_17  (1 unrouted)
FPC2_18  (1 unrouted)
FPC2_19  (1 unrouted)
FPC2_20  (1 unrouted)
FPC3_1  (1 unrouted)
FPC3_2  (1 unrouted)
FPC3_3  (1 unrouted)
FPC3_4  (1 unrouted)
FPC3_5  (1 unrouted)
FPC3_6  (1 unrouted)
FPC3_7  (1 unrouted)
FPC3_8  (1 unrouted)
FPC3_9  (1 unrouted)
FPC3_10  (1 unrouted)
FPC3_11  (1 unrouted)
FPC3_12  (1 unrouted)
FPC3_13  (1 unrouted)
FPC3_14  (1 unrouted)
FPC3_15  (1 unrouted)
FPC3_16  (1 unrouted)
FPC3_17  (1 unrouted)
FPC3_18  (1 unrouted)
FPC3_19  (1 unrouted)
FPC3_20  (1 unrouted)
FPC4_1  (1 unrouted)
FPC4_2  (1 unrouted)
FPC4_3  (1 unrouted)
FPC4_4  (1 unrouted)
FPC4_5  (1 unrouted)
FPC4_6  (1 unrouted)
FPC4_7  (1 unrouted)
FPC4_8  (1 unrouted)
FPC4_9  (1 unrouted)
FPC4_10  (1 unrouted)
FPC4_11  (1 unrouted)
FPC4_12  (1 unrouted)
FPC4_13  (1 unrouted)
FPC4_14  (1 unrouted)
FPC4_15  (1 unrouted)
FPC4_16  (1 unrouted)
FPC4_17  (1 unrouted)
FPC4_18  (1 unrouted)
FPC4_19  (1 unrouted)
FPC4_20  (1 unrouted)
FPC5_1  (1 unrouted)
FPC5_2  (1 unrouted)
FPC5_3  (1 unrouted)
FPC5_4  (1 unrouted)
FPC5_5  (1 unrouted)
FPC5_6  (1 unrouted)
FPC5_7  (1 unrouted)
FPC5_8  (1 unrouted)
FPC5_9  (1 unrouted)
FPC5_10  (1 unrouted)
FPC5_11  (1 unrouted)
FPC5_12  (1 unrouted)
FPC5_13  (1 unrouted)
FPC5_14  (1 unrouted)
FPC5_15  (1 unrouted)
FPC5_16  (1 unrouted)
FPC5_17  (1 unrouted)
FPC5_18  (1 unrouted)
FPC5_19  (1 unrouted)
FPC5_20  (1 unrouted)
FPC6_1  (1 unrouted)
FPC6_2  (1 unrouted)
FPC6_3  (1 unrouted)
FPC6_4  (1 unrouted)
FPC6_5  (1 unrouted)
FPC6_6  (1 unrouted)
FPC6_7  (1 unrouted)
FPC6_8  (1 unrouted)
FPC6_9  (1 unrouted)
FPC6_10  (1 unrouted)
FPC6_11  (1 unrouted)
FPC6_12  (1 unrouted)
FPC6_13  (1 unrouted)
FPC6_14  (1 unrouted)
FPC6_15  (1 unrouted)
FPC6_16  (1 unrouted)
FPC6_17  (1 unrouted)
FPC6_18  (1 unrouted)
FPC6_19  (1 unrouted)
FPC6_20  (1 unrouted)
FPC7_1  (1 unrouted)
FPC7_2  (1 unrouted)
FPC7_3  (1 unrouted)
FPC7_4  (1 unrouted)
FPC7_5  (1 unrouted)
FPC7_6  (1 unrouted)
FPC7_7  (1 unrouted)
FPC7_8  (1 unrouted)
FPC7_9  (1 unrouted)
FPC7_10  (1 unrouted)
FPC7_11  (1 unrouted)
FPC7_12  (1 unrouted)
FPC7_13  (1 unrouted)
FPC7_14  (1 unrouted)
FPC7_15  (1 unrouted)
FPC7_16  (1 unrouted)
FPC7_17  (1 unrouted)
FPC7_18  (1 unrouted)
FPC7_19  (1 unrouted)
FPC7_20  (1 unrouted)
FPC8_1  (1 unrouted)
FPC8_2  (1 unrouted)
FPC8_3  (1 unrouted)
FPC8_4  (1 unrouted)
FPC8_5  (1 unrouted)
FPC8_6  (1 unrouted)
FPC8_7  (1 unrouted)
FPC8_8  (1 unrouted)
FPC8_9  (1 unrouted)
FPC8_10  (1 unrouted)
FPC8_11  (1 unrouted)
FPC8_12  (1 unrouted)
FPC8_13  (1 unrouted)
FPC8_14  (1 unrouted)
FPC8_15  (1 unrouted)
FPC8_16  (1 unrouted)
FPC8_17  (1 unrouted)
FPC8_18  (1 unrouted)
FPC8_19  (1 unrouted)
FPC8_20  (1 unrouted)
FPC9_1  (1 unrouted)
FPC9_2  (1 unrouted)
FPC9_3  (1 unrouted)
FPC9_4  (1 unrouted)
FPC9_5  (1 unrouted)
FPC9_6  (1 unrouted)
FPC9_7  (1 unrouted)
FPC9_8  (1 unrouted)
FPC9_9  (1 unrouted)
FPC9_10  (1 unrouted)
FPC9_11  (1 unrouted)
FPC9_12  (1 unrouted)
FPC9_13  (1 unrouted)
FPC9_14  (1 unrouted)
FPC9_15  (1 unrouted)
FPC9_16  (1 unrouted)
FPC9_17  (1 unrouted)
FPC9_18  (1 unrouted)
FPC9_19  (1 unrouted)
FPC9_20  (1 unrouted)
FPC10_1  (1 unrouted)
FPC10_2  (1 unrouted)
FPC10_3  (1 unrouted)
FPC10_4  (1 unrouted)
FPC10_5  (1 unrouted)
FPC10_6  (1 unrouted)
FPC10_7  (1 unrouted)
FPC10_8  (1 unrouted)
FPC10_9  (1 unrouted)
FPC10_10  (1 unrouted)
FPC10_11  (1 unrouted)
FPC10_12  (1 unrouted)
FPC10_13  (1 unrouted)
FPC10_14  (1 unrouted)
FPC10_15  (1 unrouted)
FPC10_16  (1 unrouted)
FPC10_17  (1 unrouted)
FPC10_18  (1 unrouted)
FPC10_19  (1 unrouted)
FPC10_20  (1 unrouted)
FPC11_1  (1 unrouted)
FPC11_2  (1 unrouted)
FPC11_3  (1 unrouted)
FPC11_4  (1 unrouted)
FPC11_5  (1 unrouted)
FPC11_6  (1 unrouted)
FPC11_7  (1 unrouted)
FPC11_8  (1 unrouted)
FPC11_9  (1 unrouted)
FPC11_10  (1 unrouted)
FPC11_11  (1 unrouted)
FPC11_12  (1 unrouted)
FPC11_13  (1 unrouted)
FPC11_14  (1 unrouted)
FPC11_15  (1 unrouted)
FPC11_16  (1 unrouted)
FPC11_17  (1 unrouted)
FPC11_18  (1 unrouted)
FPC11_19  (1 unrouted)
FPC11_20  (1 unrouted)
FPC12_1  (1 unrouted)
FPC12_2  (1 unrouted)
FPC12_3  (1 unrouted)
FPC12_4  (1 unrouted)
FPC12_5  (1 unrouted)
FPC12_6  (1 unrouted)
FPC12_7  (1 unrouted)
FPC12_8  (1 unrouted)
FPC12_9  (1 unrouted)
FPC12_10  (1 unrouted)
FPC12_11  (1 unrouted)
FPC12_12  (1 unrouted)
FPC12_13  (1 unrouted)
FPC12_14  (1 unrouted)
FPC12_15  (1 unrouted)
FPC12_16  (1 unrouted)
FPC12_17  (1 unrouted)
FPC12_18  (1 unrouted)
FPC12_19  (1 unrouted)
FPC12_20  (1 unrouted)
FPC13_1  (1 unrouted)
FPC13_2  (1 unrouted)
FPC13_3  (1 unrouted)
FPC13_4  (1 unrouted)
FPC13_5  (1 unrouted)
FPC13_6  (1 unrouted)
FPC13_7  (1 unrouted)
FPC13_8  (1 unrouted)
FPC13_9  (1 unrouted)
FPC13_10  (1 unrouted)
FPC13_11  (1 unrouted)
FPC13_12  (1 unrouted)
FPC13_13  (1 unrouted)
FPC13_14  (1 unrouted)
FPC13_15  (1 unrouted)
FPC13_16  (1 unrouted)
FPC13_17  (1 unrouted)
FPC13_18  (1 unrouted)
FPC13_19  (1 unrouted)
FPC13_20  (1 unrouted)
FPC14_1  (1 unrouted)
FPC14_2  (1 unrouted)
FPC14_3  (1 unrouted)
FPC14_4  (1 unrouted)
FPC14_5  (1 unrouted)
FPC14_6  (1 unrouted)
FPC14_7  (1 unrouted)
FPC14_8  (1 unrouted)
FPC14_9  (1 unrouted)
FPC14_10  (1 unrouted)
FPC14_11  (1 unrouted)
FPC14_12  (1 unrouted)
FPC14_13  (1 unrouted)
FPC14_14  (1 unrouted)
FPC14_15  (1 unrouted)
FPC14_16  (1 unrouted)
FPC14_17  (1 unrouted)
FPC14_18  (1 unrouted)
FPC14_19  (1 unrouted)
FPC14_20  (1 unrouted)
FPC15_1  (1 unrouted)
FPC15_2  (1 unrouted)
FPC15_3  (1 unrouted)
FPC15_4  (1 unrouted)
FPC15_5  (1 unrouted)
FPC15_6  (1 unrouted)
FPC15_7  (1 unrouted)
FPC15_8  (1 unrouted)
FPC15_9  (1 unrouted)
FPC15_10  (1 unrouted)
FPC15_11  (1 unrouted)
FPC15_12  (1 unrouted)
FPC15_13  (1 unrouted)
FPC15_14  (1 unrouted)
FPC15_15  (1 unrouted)
FPC15_16  (1 unrouted)
FPC15_17  (1 unrouted)
FPC15_18  (1 unrouted)
FPC15_19  (1 unrouted)
FPC15_20  (1 unrouted)
FPC16_1  (1 unrouted)
FPC16_2  (1 unrouted)
FPC16_3  (1 unrouted)
FPC16_4  (1 unrouted)
FPC16_5  (1 unrouted)
FPC16_6  (1 unrouted)
FPC16_7  (1 unrouted)
FPC16_8  (1 unrouted)
FPC16_9  (1 unrouted)
FPC16_10  (1 unrouted)
FPC16_11  (1 unrouted)
FPC16_12  (1 unrouted)
FPC16_13  (1 unrouted)
FPC16_14  (1 unrouted)
FPC16_15  (1 unrouted)
FPC16_16  (1 unrouted)
FPC16_17  (1 unrouted)
FPC16_18  (1 unrouted)
FPC16_19  (1 unrouted)
FPC16_20  (1 unrouted)
FPC17_1  (1 unrouted)
FPC17_2  (1 unrouted)
FPC17_3  (1 unrouted)
FPC17_4  (1 unrouted)
FPC17_5  (1 unrouted)
FPC17_6  (1 unrouted)
FPC17_7  (1 unrouted)
FPC17_8  (1 unrouted)
FPC17_9  (1 unrouted)
FPC17_10  (1 unrouted)
FPC17_11  (1 unrouted)
FPC17_12  (1 unrouted)
FPC17_13  (1 unrouted)
FPC17_14  (1 unrouted)
FPC17_15  (1 unrouted)
FPC17_16  (1 unrouted)
FPC17_17  (1 unrouted)
FPC17_18  (1 unrouted)
FPC17_19  (1 unrouted)
FPC17_20  (1 unrouted)
FPC18_1  (1 unrouted)
FPC18_2  (1 unrouted)
FPC18_3  (1 unrouted)
FPC18_4  (1 unrouted)
FPC18_5  (1 unrouted)
FPC18_6  (1 unrouted)
FPC18_7  (1 unrouted)
FPC18_8  (1 unrouted)
FPC18_9  (1 unrouted)
FPC18_10  (1 unrouted)
FPC18_11  (1 unrouted)
FPC18_12  (1 unrouted)
FPC18_13  (1 unrouted)
FPC18_14  (1 unrouted)
FPC18_15  (1 unrouted)
FPC18_16  (1 unrouted)
FPC18_17  (1 unrouted)
FPC18_18  (1 unrouted)
FPC18_19  (1 unrouted)
FPC18_20  (1 unrouted)
FPC19_1  (1 unrouted)
FPC19_2  (1 unrouted)
FPC19_3  (1 unrouted)
FPC19_4  (1 unrouted)
FPC19_5  (1 unrouted)
FPC19_6  (1 unrouted)
FPC19_7  (1 unrouted)
FPC19_8  (1 unrouted)
FPC19_9  (1 unrouted)
FPC19_10  (1 unrouted)
FPC19_11  (1 unrouted)
FPC19_12  (1 unrouted)
FPC19_13  (1 unrouted)
FPC19_14  (1 unrouted)
FPC19_15  (1 unrouted)
FPC19_16  (1 unrouted)
FPC19_17  (1 unrouted)
FPC19_18  (1 unrouted)
FPC19_19  (1 unrouted)
FPC19_20  (1 unrouted)
FPC20_1  (1 unrouted)
FPC20_2  (1 unrouted)
FPC20_3  (1 unrouted)
FPC20_4  (1 unrouted)
FPC20_5  (1 unrouted)
FPC20_6  (1 unrouted)
FPC20_7  (1 unrouted)
FPC20_8  (1 unrouted)
FPC20_9  (1 unrouted)
FPC20_10  (1 unrouted)
FPC20_11  (1 unrouted)
FPC20_12  (1 unrouted)
FPC20_13  (1 unrouted)
FPC20_14  (1 unrouted)
FPC20_15  (1 unrouted)
FPC20_16  (1 unrouted)
FPC20_17  (1 unrouted)
FPC20_18  (1 unrouted)
FPC20_19  (1 unrouted)
FPC20_20  (1 unrouted)
GND  (303 unrouted)
LATCH_CLK1  (7 unrouted)
LATCH_CLK2  (8 unrouted)
LATCH_CLK3  (8 unrouted)
LATCH_CLK4  (8 unrouted)
LATCH_CLK5  (7 unrouted)
N$1  (1 unrouted)
N$2  (1 unrouted)
N$3  (1 unrouted)
N$4  (1 unrouted)
N$5  (1 unrouted)
N$6  (1 unrouted)
N$7  (1 unrouted)
N$8  (1 unrouted)
N$9  (1 unrouted)
N$10  (1 unrouted)
N$12  (1 unrouted)
N$13  (1 unrouted)
N$14  (1 unrouted)
N$15  (1 unrouted)
N$16  (1 unrouted)
N$17  (1 unrouted)
N$18  (1 unrouted)
N$19  (1 unrouted)
N$21  (1 unrouted)
N$22  (1 unrouted)
SR_OUT1_1  (2 unrouted)
SR_OUT1_2  (2 unrouted)
SR_OUT1_3  (2 unrouted)
SR_OUT1_4  (2 unrouted)
SR_OUT1_5  (2 unrouted)
SR_OUT1_6  (2 unrouted)
SR_OUT1_7  (2 unrouted)
SR_OUT1_8  (2 unrouted)
SR_OUT2_1  (2 unrouted)
SR_OUT2_2  (2 unrouted)
SR_OUT2_3  (2 unrouted)
SR_OUT2_4  (2 unrouted)
SR_OUT2_5  (2 unrouted)
SR_OUT2_6  (2 unrouted)
SR_OUT2_7  (2 unrouted)
SR_OUT2_8  (2 unrouted)
SR_OUT3_1  (2 unrouted)
SR_OUT3_2  (2 unrouted)
SR_OUT3_3  (2 unrouted)
SR_OUT3_4  (2 unrouted)
SR_OUT3_5  (2 unrouted)
SR_OUT3_6  (2 unrouted)
SR_OUT3_7  (2 unrouted)
SR_OUT3_8  (2 unrouted)
SR_OUT4_1  (2 unrouted)
SR_OUT4_2  (2 unrouted)
SR_OUT4_3  (2 unrouted)
SR_OUT4_4  (2 unrouted)
SR_OUT4_5  (2 unrouted)
SR_OUT4_6  (2 unrouted)
SR_OUT4_7  (2 unrouted)
SR_OUT4_8  (2 unrouted)
SR_OUT5_1  (2 unrouted)
SR_OUT5_2  (2 unrouted)
SR_OUT5_3  (2 unrouted)
SR_OUT5_4  (2 unrouted)
SR_OUT5_5  (2 unrouted)
SR_OUT5_6  (2 unrouted)
SR_OUT5_7  (2 unrouted)
SR_OUT5_8  (2 unrouted)
SR_OUT6_1  (2 unrouted)
SR_OUT6_2  (2 unrouted)
SR_OUT6_3  (2 unrouted)
SR_OUT6_4  (2 unrouted)
SR_OUT6_5  (2 unrouted)
SR_OUT6_6  (2 unrouted)
SR_OUT6_7  (2 unrouted)
SR_OUT6_8  (2 unrouted)
SR_OUT7_1  (2 unrouted)
SR_OUT7_2  (2 unrouted)
SR_OUT7_3  (2 unrouted)
SR_OUT7_4  (2 unrouted)
SR_OUT7_5  (2 unrouted)
SR_OUT7_6  (2 unrouted)
SR_OUT7_7  (2 unrouted)
SR_OUT7_8  (2 unrouted)
SR_OUT8_1  (2 unrouted)
SR_OUT8_2  (2 unrouted)
SR_OUT8_3  (2 unrouted)
SR_OUT8_4  (2 unrouted)
SR_OUT8_5  (2 unrouted)
SR_OUT8_6  (2 unrouted)
SR_OUT8_7  (2 unrouted)
SR_OUT8_8  (2 unrouted)
SR_OUT9_1  (2 unrouted)
SR_OUT9_2  (2 unrouted)
SR_OUT9_3  (2 unrouted)
SR_OUT9_4  (2 unrouted)
SR_OUT9_5  (2 unrouted)
SR_OUT9_6  (2 unrouted)
SR_OUT9_7  (2 unrouted)
SR_OUT9_8  (2 unrouted)
SR_OUT10_1  (2 unrouted)
SR_OUT10_2  (2 unrouted)
SR_OUT10_3  (2 unrouted)
SR_OUT10_4  (2 unrouted)
SR_OUT10_5  (2 unrouted)
SR_OUT10_6  (2 unrouted)
SR_OUT10_7  (2 unrouted)
SR_OUT10_8  (2 unrouted)
SR_OUT11_1  (2 unrouted)
SR_OUT11_2  (2 unrouted)
SR_OUT11_3  (2 unrouted)
SR_OUT11_4  (2 unrouted)
SR_OUT11_5  (2 unrouted)
SR_OUT11_6  (2 unrouted)
SR_OUT11_7  (2 unrouted)
SR_OUT11_8  (2 unrouted)
SR_OUT12_1  (2 unrouted)
SR_OUT12_2  (2 unrouted)
SR_OUT12_3  (2 unrouted)
SR_OUT12_4  (2 unrouted)
SR_OUT12_5  (2 unrouted)
SR_OUT12_6  (2 unrouted)
SR_OUT12_7  (2 unrouted)
SR_OUT12_8  (2 unrouted)
SR_OUT13_1  (2 unrouted)
SR_OUT13_2  (2 unrouted)
SR_OUT13_3  (2 unrouted)
SR_OUT13_4  (2 unrouted)
SR_OUT13_5  (2 unrouted)
SR_OUT13_6  (2 unrouted)
SR_OUT13_7  (2 unrouted)
SR_OUT13_8  (2 unrouted)
SR_OUT14_1  (2 unrouted)
SR_OUT14_2  (2 unrouted)
SR_OUT14_3  (2 unrouted)
SR_OUT14_4  (2 unrouted)
SR_OUT14_5  (2 unrouted)
SR_OUT14_6  (2 unrouted)
SR_OUT14_7  (2 unrouted)
SR_OUT14_8  (2 unrouted)
SR_OUT15_1  (2 unrouted)
SR_OUT15_2  (2 unrouted)
SR_OUT15_3  (2 unrouted)
SR_OUT15_4  (2 unrouted)
SR_OUT15_5  (2 unrouted)
SR_OUT15_6  (2 unrouted)
SR_OUT15_7  (2 unrouted)
SR_OUT15_8  (2 unrouted)
SR_OUT16_1  (2 unrouted)
SR_OUT16_2  (2 unrouted)
SR_OUT16_3  (2 unrouted)
SR_OUT16_4  (2 unrouted)
SR_OUT16_5  (2 unrouted)
SR_OUT16_6  (2 unrouted)
SR_OUT16_7  (2 unrouted)
SR_OUT16_8  (2 unrouted)
SR_OUT17_1  (2 unrouted)
SR_OUT17_2  (2 unrouted)
SR_OUT17_3  (2 unrouted)
SR_OUT17_4  (2 unrouted)
SR_OUT17_5  (2 unrouted)
SR_OUT17_6  (2 unrouted)
SR_OUT17_7  (2 unrouted)
SR_OUT17_8  (2 unrouted)
SR_OUT18_1  (2 unrouted)
SR_OUT18_2  (2 unrouted)
SR_OUT18_3  (2 unrouted)
SR_OUT18_4  (2 unrouted)
SR_OUT18_5  (2 unrouted)
SR_OUT18_6  (2 unrouted)
SR_OUT18_7  (2 unrouted)
SR_OUT18_8  (2 unrouted)
SR_OUT19_1  (2 unrouted)
SR_OUT19_2  (2 unrouted)
SR_OUT19_3  (2 unrouted)
SR_OUT19_4  (2 unrouted)
SR_OUT19_5  (2 unrouted)
SR_OUT19_6  (2 unrouted)
SR_OUT19_7  (2 unrouted)
SR_OUT19_8  (2 unrouted)
SR_OUT20_1  (2 unrouted)
SR_OUT20_2  (2 unrouted)
SR_OUT20_3  (2 unrouted)
SR_OUT20_4  (2 unrouted)
SR_OUT20_5  (2 unrouted)
SR_OUT20_6  (2 unrouted)
SR_OUT20_7  (2 unrouted)
SR_OUT20_8  (2 unrouted)
SR_OUT21_1  (2 unrouted)
SR_OUT21_2  (2 unrouted)
SR_OUT21_3  (2 unrouted)
SR_OUT21_4  (2 unrouted)
SR_OUT21_5  (2 unrouted)
SR_OUT21_6  (2 unrouted)
SR_OUT21_7  (2 unrouted)
SR_OUT21_8  (2 unrouted)
SR_OUT22_1  (2 unrouted)
SR_OUT22_2  (2 unrouted)
SR_OUT22_3  (2 unrouted)
SR_OUT22_4  (2 unrouted)
SR_OUT22_5  (2 unrouted)
SR_OUT22_6  (2 unrouted)
SR_OUT22_7  (2 unrouted)
SR_OUT22_8  (2 unrouted)
SR_OUT23_1  (2 unrouted)
SR_OUT23_2  (2 unrouted)
SR_OUT23_3  (2 unrouted)
SR_OUT23_4  (2 unrouted)
SR_OUT23_5  (2 unrouted)
SR_OUT23_6  (2 unrouted)
SR_OUT23_7  (2 unrouted)
SR_OUT23_8  (2 unrouted)
SR_OUT24_1  (2 unrouted)
SR_OUT24_2  (2 unrouted)
SR_OUT24_3  (2 unrouted)
SR_OUT24_4  (2 unrouted)
SR_OUT24_5  (2 unrouted)
SR_OUT24_6  (2 unrouted)
SR_OUT24_7  (2 unrouted)
SR_OUT24_8  (2 unrouted)
SR_OUT25_1  (2 unrouted)
SR_OUT25_2  (2 unrouted)
SR_OUT25_3  (2 unrouted)
SR_OUT25_4  (2 unrouted)
SR_OUT25_5  (2 unrouted)
SR_OUT25_6  (2 unrouted)
SR_OUT25_7  (2 unrouted)
SR_OUT25_8  (2 unrouted)
VCC_LATCH  (103 unrouted)
VCC_SR  (53 unrouted)